# Allegro board VALVECONTROLLER.brd
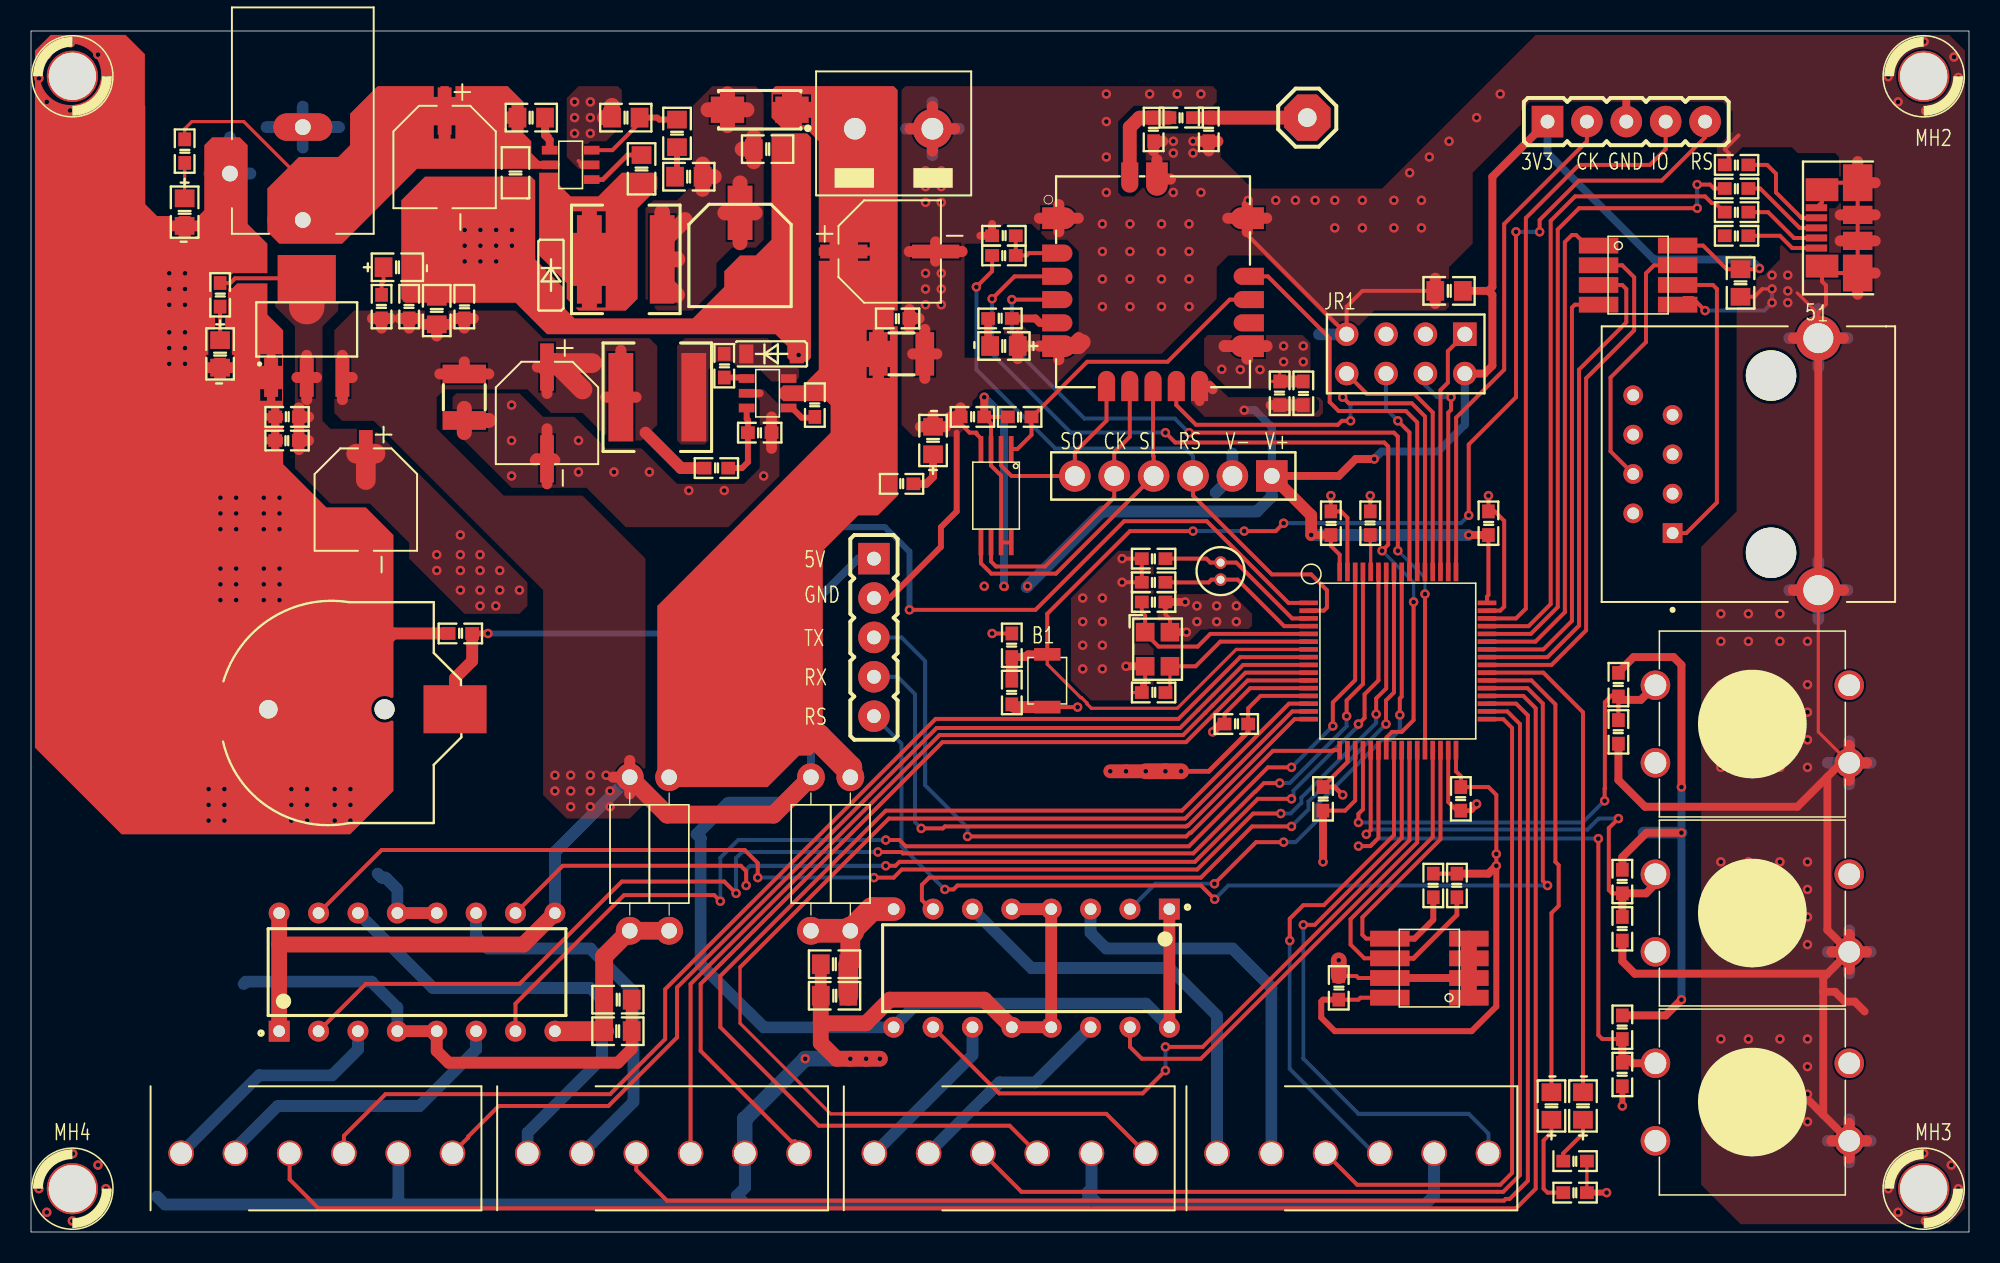
[diagram p0: board, top side]
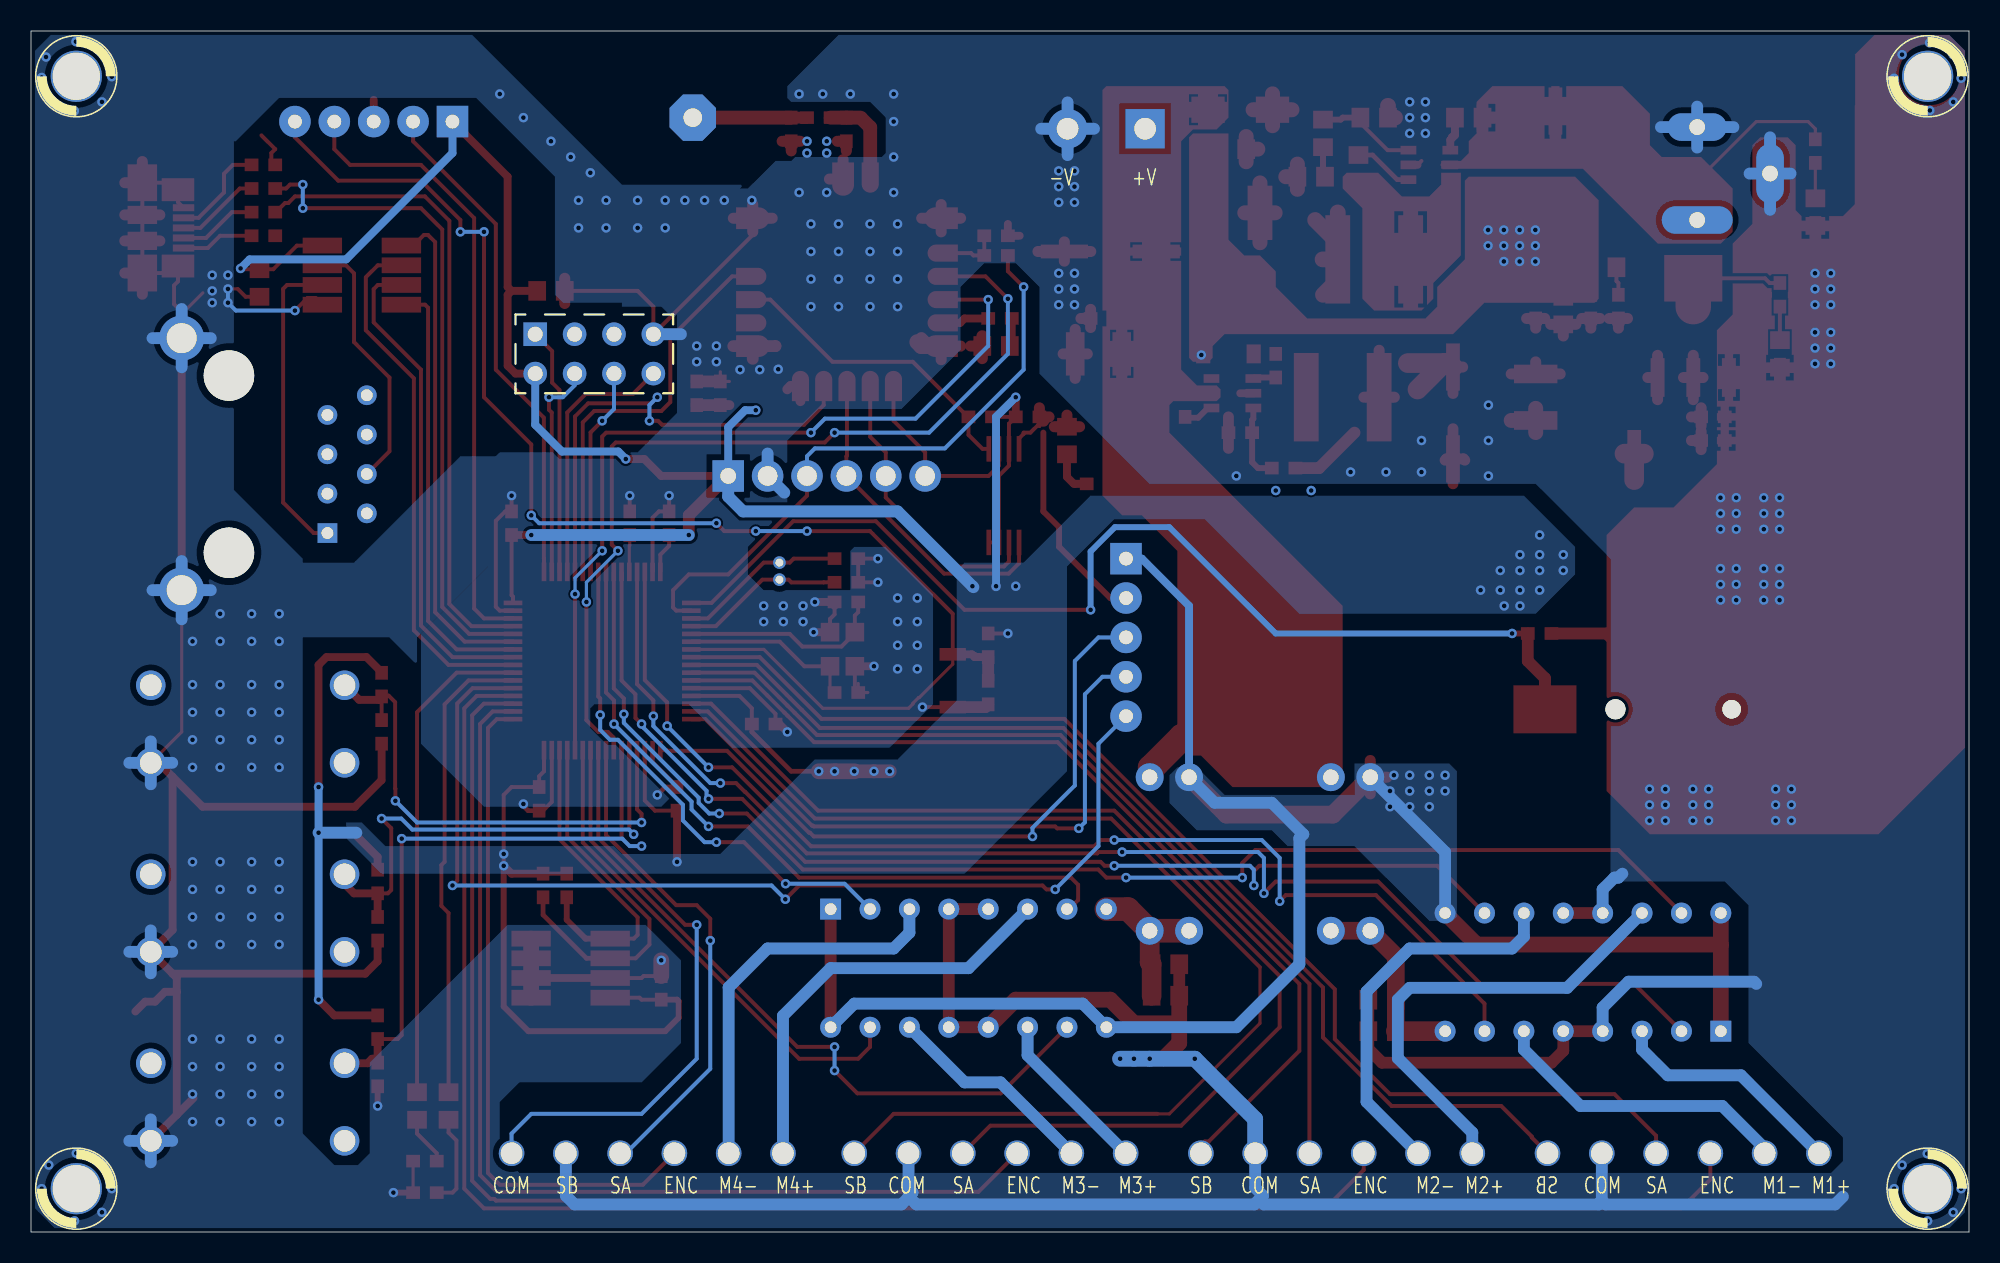
[diagram p1: board, bottom side, seen from below]

Outline 124.97 x 77.47 mm; copper layers: TOP, BOTTOM. Coordinates in mm from the lower left corner of the outline.
Outline path: 0,77.47 0,0 124.97,0 124.97,77.47 0,77.47

## Design rules (mm)
constraint set DEFAULT: min track width 0.203

## Placement (name value [footprint] x y rotation side)
B1  Reset  [B3U-1000P]  65.53 35.56 270 top
C1  10nF/25V  [C0805]  39.37 68.58 270 top
C2  100uF/35V  [CAP_AL_D]  26.67 69.34 270 top
C3  100nF/25V  [C0805]  31.24 68.33 270 top
C4  100nF/25V  [C0805]  47.5 69.85 0 top
C5  100uF/25V  [CAPSMD_D6P3MM]  45.72 62.99 0 top
C6  10nF  [C0603]  44.7 55.88 90 top
C7  100uF/35V  [CAP_AL_D]  55.37 63.25 0 top
C8  100nF  [C0603]  55.88 58.93 0 top
C9  10u/35V  [CAP_1210]  56.13 56.64 0 top
C10  22u/6.3V  [CAP_1210]  27.94 53.85 270 top
C11  220u/16V  [CAP_AL_D]  33.27 52.83 270 top
C12  100nF  [C0603]  27.94 59.69 90 top
C13  10uF  [C0805]  26.16 59.44 90 top
C14  100nF  [C0603]  24.38 59.69 270 top
C15  1uF  [C0603]  16.51 52.58 180 top
C16  100nF  [C0603]  16.51 51.05 0 top
C17  220uF/10v  [CAP_AL_D]  21.59 47.24 270 top
C18  18pF  [C0603]  72.39 43.43 0 top
C19  18pF  [C0603]  72.39 41.91 0 top
C20  18pF  [C0603]  72.39 40.64 0 top
C21  18pF  [C0603]  72.39 34.8 180 top
C22  0.1uF/6.3V  [C0603]  27.69 38.61 180 top
C23  0.1uF/6.3V  [C0603]  83.82 45.72 90 top
C24  0.1uF/6.3V  [C0603]  83.31 27.94 90 top
C25  0.1uF/6.3V  [C0603]  92.2 27.94 270 top
C26  0.1uF/6.3V  [C0603]  93.98 45.72 90 top
C27  0.1uF  [C0603]  77.72 32.77 180 top
C28  0.1uF  [C0603]  84.33 15.75 90 top
C29  0.1uF/6.3V  [C0603]  102.36 32.26 270 top
C30  0.1uF/6.3V  [C0603]  102.62 19.56 270 top
C31  0.1uF/6.3V  [C0603]  102.62 10.16 270 top
C32  0.1uF/6.3V  [C0603]  63.25 34.8 270 top
C33  100uF  [C0805]  51.82 17.27 180 top
C34  100nF  [C0805]  51.82 15.24 0 top
C35  100nF  [C0805]  37.85 12.95 180 top
C36  10uF  [C0805]  37.85 14.99 0 top
C37  10uF  [C0603]  82.04 54.1 90 top
C38  0.1uF  [C0603]  80.52 54.1 270 top
C39  0.1uF  [C0603]  62.74 64.26 180 top
C40  10pF  [C0603]  72.39 71.12 270 top
C41  6pF  [C0603]  75.95 71.12 270 top
C42  0.1uF  [C0603]  60.71 52.58 180 top
C43  0.1uF  [C0805]  91.44 60.71 0 top
C44  0.1uF  [C0805]  110.24 61.21 90 top
D1  1N4007  [DO214AC_SMA]  46.99 72.39 180 top
D2  1N5819  [SOD123]  33.53 61.72 270 top
D3  1N5819  [SOD123]  47.75 56.64 0 top
D4  LED  [LED0805]  12.19 56.64 270 top
D5  LED  [LED0805]  23.62 62.23 0 top
D6  LED  [LED0805]  58.17 51.05 90 top
D7  LED  [LED0805]  9.91 65.79 270 top
D8  LED  [LED0805]  98.04 8.13 90 top
D9  LED  [LED0805]  100.08 8.13 90 top
D10  LED  [LED0805]  62.74 57.15 180 top
E1  ANTENNA  [HEADER_1_3MM]  82.3 71.88 0 top
J1  16VDC  [CONN_JACK_DC]  17.53 65.28 90 top
J2  HEADER 2  [DOMINO2_5]  55.63 71.17 0 top
J3  JTAG/STSW  [HEADER_5]  97.79 71.63 0 top
J4  HUM011D-5-S  [CON5_MICROUSB_SKT_SM]  116.46 64.77 180 top
J5  HEADER 6  [DOMINO6-3_5]  66.29 5.08 180 top
J6  HEADER 6  [DOMINO6-3_5]  88.39 5.08 180 top
J7  HEADER 6  [DOMINO6-3_5]  21.59 5.08 180 top
J8  HEADER 6  [DOMINO6-3_5]  43.94 5.08 180 top
J9  ZW_JTAG  [HEADER-6]  73.66 48.77 270 top
J10  RJ45-8N4-B  [TE_RJ45-8N4-B]  107.85 49.08 90 top
J11  GSM  [HEADER_5]  54.36 43.43 270 top
JR1  ESP8266  [HEADER_4X2]  92.46 57.91 270 top
L1  8.8uH/1.7A  [IND_6X6MM]  38.35 62.74 0 top
L2  8.8uH/1.7A  [IND_6X6MM]  40.39 53.85 180 top
L3  8.2nH  [C0603]  74.17 71.88 0 top
MH1  HOLE 4mm  [MH_3MM_1]  2.67 74.55 0 top
MH*  -  [unnamed]  2.67 2.79 0 top
MH*#2  -  [unnamed]  122.05 2.79 0 top
MH*#3  -  [unnamed]  122.05 74.55 0 top
R1  10k  [R0805]  32.26 71.88 180 top
R2  330k  [R0805]  41.66 70.87 90 top
R3  10k  [R0805]  42.42 68.07 180 top
R4  20k  [R0805]  38.35 71.88 0 top
R5  10K  [R0603]  50.55 53.34 270 top
R6  49.9K  [R0603]  44.2 49.28 180 top
R7  10K  [R0603]  46.99 51.56 0 top
R8  470  [R0603]  12.19 60.45 90 top
R9  1K  [R0603]  22.61 59.69 270 top
R10  4k7  [R0603]  56.13 48.26 180 top
R11  10K  [R0603]  9.91 69.72 90 top
R12  4.7K  [R0603]  86.36 45.72 270 top
R13  0R/NC  [R0603]  109.98 64.26 0 top
R14  22R  [R0603]  109.98 65.79 0 top
R15  22R  [R0603]  109.98 67.31 0 top
R16  0R/NC  [R0603]  109.98 68.83 0 top
R17  10K  [R0603]  90.42 22.35 270 top
R18  10K  [R0603]  91.95 22.35 270 top
R19  4.7K  [R0603]  63.25 37.85 270 top
R20  10K  [R0603]  102.36 35.31 270 top
R21  10K  [R0603]  102.62 22.61 270 top
R22  10K  [R0603]  102.62 13.21 270 top
R23  360  [R0603]  99.57 2.54 0 top
R24  360  [R0603]  99.57 4.57 0 top
R25  0R/NC  [RES_DIP]  52.83 24.51 90 top
R26  0R/NC  [RES_DIP]  50.29 24.26 270 top
R27  0R/NC  [RES_DIP]  41.15 24.51 90 top
R28  0R/NC  [RES_DIP]  38.61 24.26 270 top
R29  22  [R0603]  62.74 62.99 0 top
R30  360  [R0603]  62.48 58.93 180 top
R31  10K  [R0603]  63.75 52.58 0 top
SW1  DETECT SW  [TACT_SWITCH_12X12X7MM_DIP]  111 32.77 270 top
SW2  DETECT SW  [TACT_SWITCH_12X12X7MM_DIP]  111 20.57 270 top
SW3  DETECT SW  [TACT_SWITCH_12X12X7MM_DIP]  111 8.38 270 top
U1  AP3211  [SOT23-6]  34.8 68.83 180 top
U2  AP3211  [SOT23-6]  47.5 54.1 0 top
U3  LM1117 3.3V  [SOT-223]  17.78 58.22 270 top
U4  LQFP64  [LQFP-64]  88.14 36.83 0 top
U5  3V  [BAT_CR1220]  18.99 33.72 270 top
U6  AT2401A/SO  [SOIC-8]  90.17 17.02 180 top
U7  L293D  [DIP16]  64.52 17.02 270 top
U8  L293D  [DIP16]  24.89 16.76 90 top
U9  ZM5202  [ZM5202_A]  79.5 53.59 90 top
U10  CAT25256  [TSSOP-8]  62.23 47.5 270 top
U11  MAX485  [SOIC-8]  103.63 61.72 0 top
Y1  CRYSTAL  [XTAL_2P_TH_1P1MMP]  76.71 43.18 270 top
Y2  12M-18ppm  [CRY3225_M]  72.64 37.59 90 top

## Library data of the parts
B1 = SW PUSHBUTTON-SPST-2_0
C1 C6 C14 C16 C38 C39 C42-C44 = CAP NP
C2 C5 C7 C11 C17 C33 C36 C37 = CAP
C3 C4 = CAP_USER
C8 C12 C13 C15 C34 C35 = Cap 0603
C9 C10 = CAP NP: User Part Number: PartNr
C18-C32 = CAP NP_0
C40 = C-10pF/50V-SMD0805
C41 = C-6pF/50V-SMD0805
D1 = DIODE
D2 = SS34_0
D3 = SS34_2
D4-D7 = LED_0
D8-D10 = LED
E1 = ANTENNA_0
J1 = CONN JACK PWR: User Part Number: X; Tolerance: X
J2 = HEADER 2
J3 J11 = HEADER 5
J4 = USB MIN_6
J5-J9 = HEADER 6
J10 = RJ45-8N4-B
JR1 = CONN FB 8-R
L1 L2 = INDUCTOR
L3 = L-8.2nH-SMD0805
MH1 = MOUNTING HOLE
R1 R13-R16 R25-R28 = RESISTOR
R2-R4 R12 R19 = RESISTOR_0
R5-R7 R23 R24 R29-R31 = RES-SM0402_0
R8-R11 R17 R18 R20-R22 = Resistor 0603
SW1-SW3 = SW PUSHBUTTON-SPST-2
U1 U2 = PMIC_SOT23-6
U3 = RT9193-33GB_1
U4 = STM32-64P_0
U5 = CR2302_1
U6 = AT2401A/SO_1
U7 = L293D_2
U8 = L293D_1
U9 = ZM5202
U10 = CAT25C02_0
U11 = MAX485_1
Y1 = CRYSTAL
Y2 = CRYSTAL-4_0

## Footprints (pads in the part's own frame, mm; a bottom-side part is the same pattern mirrored in y, then rotated)
B3U-1000P
  rect 0.813x1.702 smd: 1(-1.702,0) 2(1.702,0)
BAT_CR1220
  round 1.295 hole 1.295 unplated: (0,3.81)
  round 1.194 hole 1.194 unplated: (0,-3.683)
  rect 3.099x4.064 smd: 1(0,8.357) 2(0,-8.128)
C0603
  rect 0.889x0.813 smd: 1(-0.762,0) 2(0.762,0)
C0805
  rect 1.143x1.27 smd: 1(-0.889,0) 2(0.889,0)
CAP_1210
  rect 1.2x2.8 smd: 1(-1.5,0) 2(1.5,0)
CAP_AL_D
  rect 3.048x0.889 smd: 1(-2.962,0) 2(2.962,0)
CAPSMD_D6P3MM
  rect 1.6x3.5 smd: 1(0,2.75) 2(0,-2.75)
CON5_MICROUSB_SKT_SM
  rect 1.38x0.45 smd: 1(1.33,1.3) 2(1.33,0.65) 3(1.33,0) 4(1.33,-0.65) 5(1.33,-1.3)
  rect 1.9x1.175 smd: 6(-1.33,0.837) 11(-1.33,-0.837)
  rect 1.9x2.375 smd: 7(-1.33,2.913) 10(-1.33,-2.913)
  rect 2.1x1.475 smd: 8(0.97,2.463) 9(0.97,-2.463)
CONN_JACK_DC
  oval 1.778x4.572 hole 1.016: 1(0,0)
  oval 1.778x3.81 hole 1.016: 2(5.994,0)
  oval 3.81x1.778 hole 1.016: 3(2.997,4.699)
CRY3225_M
  rect 1.2x1.2 smd: 1(1.1,0.8) 2(-1.101,0.8) 3(-1.101,-0.8) 4(1.1,-0.8)
DIP16
  rect 1.35x1.35 hole 0.75: 1(-3.81,8.89)
  round 1.35 hole 0.75: 2(-3.81,6.35) 3(-3.81,3.81) 4(-3.81,1.27) 5(-3.81,-1.27) 6(-3.81,-3.81) 7(-3.81,-6.35) 8(-3.81,-8.89) 9(3.81,-8.89) 10(3.81,-6.35) 11(3.81,-3.81) 12(3.81,-1.27) 13(3.81,1.27) 14(3.81,3.81) 15(3.81,6.35) 16(3.81,8.89)
DO214AC_SMA
  rect 2.15x1.696 smd: 1(-2.08,0) 2(2.08,0)
DOMINO2_5
  rect 2.54x2.54 hole 1.397: 1(-2.5,0)
  round 2.54 hole 1.397: 2(2.5,0)
DOMINO6-3_5
  round 1.651 hole 1.397: 1(-5.588,0) 2(-2.088,0) 3(1.412,0) 4(4.912,0) 5(8.412,0) 6(11.912,0)
HEADER-6
  rect 2.032x2.032 hole 1.016: 1(0,6.35)
  round 2.032 hole 1.27: 2(0,3.81) 3(0,1.27) 4(0,-1.27) 5(0,-3.81) 6(0,-6.35)
HEADER_1_3MM
  rrect 3x3 hole 1.2: 1(0,0)
HEADER_4X2
  rect 1.524x1.524 hole 0.965: 1(0,0)
  round 1.524 hole 0.965: 2(0,-2.54) 3(0,-5.08) 4(0,-7.62) 5(2.54,-7.62) 6(2.54,-5.08) 7(2.54,-2.54) 8(2.54,0)
HEADER_5
  rect 2.032x2.032 hole 0.889: 1(0,0)
  round 2.032 hole 0.889: 2(2.54,0) 3(5.08,0) 4(7.62,0) 5(10.16,0)
IND_6X6MM
  rect 1.6x5.7 smd: 1(-2.35,0) 2(2.35,0)
LED0805
  rect 1.143x1.27 smd: 1(-0.889,0) 2(0.889,0)
LQFP-64
  rect 1.2x0.3 smd: 1(-5.75,3.75) 2(-5.75,3.25) 3(-5.75,2.75) 4(-5.75,2.25) 5(-5.75,1.75) 6(-5.75,1.25) 7(-5.75,0.75) 8(-5.75,0.25) 9(-5.75,-0.25) 10(-5.75,-0.75) 11(-5.75,-1.25) 12(-5.75,-1.75) 13(-5.75,-2.25) 14(-5.75,-2.75) 15(-5.75,-3.25) 16(-5.75,-3.75) 33(5.75,-3.75) 34(5.75,-3.25) 35(5.75,-2.75) 36(5.75,-2.25) 37(5.75,-1.75) 38(5.75,-1.25) 39(5.75,-0.75) 40(5.75,-0.25) 41(5.75,0.25) 42(5.75,0.75) 43(5.75,1.25) 44(5.75,1.75) 45(5.75,2.25) 46(5.75,2.75) 47(5.75,3.25) 48(5.75,3.75)
  rect 0.3x1.2 smd: 17(-3.75,-5.75) 18(-3.25,-5.75) 19(-2.75,-5.75) 20(-2.25,-5.75) 21(-1.75,-5.75) 22(-1.25,-5.75) 23(-0.75,-5.75) 24(-0.25,-5.75) 25(0.25,-5.75) 26(0.75,-5.75) 27(1.25,-5.75) 28(1.75,-5.75) 29(2.25,-5.75) 30(2.75,-5.75) 31(3.25,-5.75) 32(3.75,-5.75) 49(3.75,5.75) 50(3.25,5.75) 51(2.75,5.75) 52(2.25,5.75) 53(1.75,5.75) 54(1.25,5.75) 55(0.75,5.75) 56(0.25,5.75) 57(-0.25,5.75) 58(-0.75,5.75) 59(-1.25,5.75) 60(-1.75,5.75) 61(-2.25,5.75) 62(-2.75,5.75) 63(-3.25,5.75) 64(-3.75,5.75)
MH_3MM_1
  round 3.302 hole 3.048: 1(0,0)
R0603
  rect 0.889x0.813 smd: 1(-0.762,0) 2(0.762,0)
R0805
  rect 1.143x1.27 smd: 1(-0.889,0) 2(0.889,0)
RES_DIP
  round 1.8 hole 1: 1(-5.08,0) 2(4.826,0)
SOD123
  rect 0.914x1.219 smd: 1(1.626,0) 2(-1.626,0)
SOIC-8
  rect 2.54x1.016 smd: 1(-2.55,1.905) 2(-2.55,0.635) 3(-2.55,-0.635) 4(-2.55,-1.905) 5(2.55,-1.905) 6(2.55,-0.635) 7(2.55,0.635) 8(2.55,1.905)
SOT23-6
  rect 1.016x0.559 smd: 1(-1.35,0.95) 2(-1.35,0) 3(-1.35,-0.95) 4(1.35,-0.95) 5(1.35,0) 6(1.35,0.95)
SOT-223
  rect 2.5x0.9 smd: 1(3.1,-2.3) 2(3.1,0) 3(3.1,2.3)
  rect 3x3.75 smd: 4(-3.3,0)
TACT_SWITCH_12X12X7MM_DIP
  round 1.905 hole 1.397: 1(-2.502,-6.248) 2(-2.502,6.248) 3(2.502,-6.248) 4(2.502,6.248)
TE_RJ45-8N4-B
  round 3.251 hole 3.251 unplated: (-5.27,-4.35) (6.16,-4.35)
  rect 1.27x1.27 hole 0.762: 1(-4,2)
  round 1.27 hole 0.762: 2(-2.73,4.54) 3(-1.46,2) 4(-0.19,4.54) 5(1.08,2) 6(2.35,4.54) 7(3.62,2) 8(4.89,4.54)
  round 2.896 hole 1.93: S1(-7.683,-7.398) S2(8.573,-7.398)
TSSOP-8
  rect 1.651x0.305 smd: 1(-3.017,0.975) 2(-3.017,0.325) 3(-3.017,-0.325) 4(-3.017,-0.975) 5(3.017,-0.975) 6(3.017,-0.325) 7(3.017,0.325) 8(3.017,0.975)
unnamed
  round 3.302 hole 3.048: 1(0,0)
XTAL_2P_TH_1P1MMP
  round 0.813 hole 0.508: 1(0,0) 2(1.1,0)
ZM5202_A
  custom 1.402x2.15 smd: 1(11.8,13.225) 6(3.55,13.225) 12(3.55,1.075) 16(11.8,1.075)
  custom 1.102x1.952 smd: 2(9.55,13.325) 3(8.05,13.325) 4(6.55,13.325) 5(5.05,13.325) 13(5.05,0.975) 14(6.55,0.975) 15(8.05,0.975)
  custom 1.952x1.102 smd: 7(0.975,10.15) 8(0.975,8.65) 9(0.975,7.15) 10(0.975,5.65) 11(0.975,4.15) 18(14.425,8.65)
  custom 2.15x1.402 smd: 17(14.325,6.9)

## Nets
13.8V: C4.1 C5.1 D1.2 L1.2 R3.1
16V: C2.1 C3.1 J1.1 R1.2 R11.2 U1.5
GND: B1.2 C2.2 C3.2 C4.2 C5.2 C7.2 C8.2 C9.2 C10.2 C11.2 C12.2 C13.2 C14.1 C15.2 C16.1 C17.2 C18.1 C19.1 C20.2 C21.2 C22.2 C23.2 C24.2 C25.2 C26.2 C27.2 C28.2 C29.2 C30.2 C31.2 C32.2 C33.2 C34.1 C35.1 C36.2 C37.2 C38.1 C39.2 C40.2 C41.2 C42.2 C43.1 C44.1 D2.1 D3.1 D4.2(CATHODE) D5.2(CATHODE) D6.2(CATHODE) D7.2(CATHODE) D10.1(CATHODE) J1.2 J1.3 J2.2 J3.3 J4.5 J4.6 J4.7 J4.8 J4.9 J4.10 J4.11 J5.2 J6.2 J7.2 J8.2 J9.2 J10.S1 J10.S2(SHIELD__1) J11.2 JR1.4 R4.1 R7.2 R12.1 R16.1 R23.2 R24.2 SW1.4 SW2.4 SW3.4 U1.2 U2.2 U3.1 U4.12(VSSA) U4.18 U4.31 U4.47 U4.63 U5.2(-) U6.1 U6.2 U6.3 U6.4 U6.7(WP) U7.4 U7.5 U7.12 U7.13 U8.4 U8.5 U8.12 U8.13 U9.1 U9.6 U9.12 U9.16 U9.17 U10.4 U11.5 Y2.2 Y2.4
VCC3.3V: C15.1 C16.2 C17.1 C23.1 C24.1 C25.1 C26.1 C27.1 C28.1 C37.1 C38.2 C42.1 C43.2 C44.2 J3.1 J9.1 JR1.8 R8.2 R17.1 R18.1 R19.1 R20.1 R21.1 R22.1 R31.1 U3.2 U3.4 U4.13 U4.19 U4.32 U4.48 U4.64 U6.8 U9.11 U10.3(W\P\) U10.7 U10.8 U11.8(VCC)
VCC_5V: C10.1 C11.1 C12.1 C13.1 C14.2 J11.1 L2.2 R6.2 R9.2 R26.1 R28.1 U3.3(VIN) U7.1 U7.9 U7.16(VSS) U8.1 U8.9 U8.16(VSS)
VIN: C7.1 C8.1 C9.1 D1.1(K) J2.1 R5.1 R10.2 R25.2 R27.2 U2.5
ANTEN: C41.1 E1.1 L3.2
BT_1: C29.1 R20.2 SW1.1 U4.20
BT_2: C30.1 R21.2 SW2.1 U4.21
BT_3: C31.1 R22.2 SW3.1 U4.22
DBG_LED_1: D8.2 U4.38
DBG_LED_2: D9.2 U4.39
ESP_CHPD: JR1.6 U4.55
ESP_GPIO1: JR1.2
ESP_GPIO2: JR1.3
ESP_RST: JR1.7 U4.50
ESP_RX: JR1.1 U4.51
ESP_TX: JR1.5 U4.52
GSM_RST: J11.5 U4.37
GSM_RX: J11.4 U4.16
GSM_TX: J11.3 U4.17
JTCK-SWCLK: J3.2 U4.49
JTMS-SWDIO: J3.4 U4.46
LED: R30.1 U9.5
MCU_DM: R15.1 U4.44
MCU_DP: R14.1 U4.45
MCU_SCL: R18.2 U4.29 U6.6
MCU_SDA: R17.2 U4.30 U6.5
MOTOR1_A: J5.6 U7.11
MOTOR1_B: J5.5 U7.14
MOTOR1_ENC: J5.4 U4.34
MOTOR1_SA: J5.3 U4.14
MOTOR1_SB: J5.1 U4.15
MOTOR2_A: J6.6 U7.6
MOTOR2_B: J6.5 U7.3
MOTOR2_ENC: J6.4 U4.33
MOTOR2_SA: J6.3 U4.24
MOTOR2_SB: J6.1 U4.25
MOTOR3_A: J7.6 U8.3
MOTOR3_B: J7.5 U8.6
MOTOR3_ENC: J7.4 U4.36
MOTOR3_SA: J7.3 U4.8
MOTOR3_SB: J7.1 U4.9
MOTOR4_A: J8.6 U8.14
MOTOR4_B: J8.5 U8.11
MOTOR4_ENC: J8.4 U4.35
MOTOR4_SA: J8.3 U4.10
MOTOR4_SB: J8.1 U4.11
NRST: B1.1 C32.1 J3.5 R19.2 U4.7
PC14: C18.2 U4.3 Y1.1
PC15: C19.2 U4.4 Y1.2
PWM1_A: U4.26 U7.10
PWM1_B: U4.27 U7.15
PWM2_A: U4.56 U7.2
PWM2_B: U4.57 U7.7
PWM3_A: U4.58 U8.15
PWM3_B: U4.59 U8.10
PWM4_A: U4.61 U8.2
PWM4_B: U4.62 U8.7
RF: C40.1 L3.1 U9.18
RS485_A: J10.1 U11.6
RS485_B: J10.4 U11.7
RS485_DE: U4.41 U11.3
RS485_DI: U4.42 U11.4
RS485_RE: U4.40 U11.2
RS485_RO: U4.43 U11.1
USB_DM: J4.2 R14.2
USB_DP: J4.3 R15.2
VS_L298A: C33.1 C34.2 R25.1 R26.2 U7.8
VS_L298B: C35.2 C36.1 R27.1 R28.2 U8.8
ZM_INT0: U4.23 U9.3
ZM_INT1: U4.28 U9.4
ZM_RESET: J9.3 R29.1 U4.2
ZM_RX: U4.53 U9.10
ZM_TX: U4.54 U9.15
ZWAVE_SPI_CS: R31.2 U9.14(ZEROX) U10.1
ZWAVE_SPI_MISO: J9.6 U9.7 U10.2
ZWAVE_SPI_MOSI: J9.4 U9.9 U10.5
ZWAVE_SPI_SCLK: J9.5 U9.8 U10.6
N7856489: R12.2 U4.60
N7856549: C21.1 U4.6 Y2.3(XOUT)
N7856557: C20.1 U4.5 Y2.1
N7858677: D4.1 R8.1
N7861566: C39.1 R29.2 U9.2
N7870414: J4.1 R13.2
N7870518: J4.4(ID) R16.2
N7874965: C22.1 U4.1 U5.1
N7889145: D8.1(CATHODE) R23.1
N7938829: R13.1
N7950983: R1.1 U1.4
N7951075: C1.2 D2.2(CATHODE) L1.1 U1.6(SW)
N7951087: R2.2 R4.2 U1.3
N7953648: C1.1 U1.1
N7971855: R5.2 U2.4
N7971871: C6.1 U2.1
N7971879: C6.2 D3.2(CATHODE) L2.1 U2.6(SW)
N7971887: R6.1 R7.1 U2.3
N7975298: D9.1(CATHODE) R24.1
N7976019: D5.1 R9.1
N7976225: D6.1 R10.1
N7976823: D7.1 R11.1
N79509350: R2.1 R3.2
N79587921: D10.2 R30.2

Pads without a net: J10 2 3 5 6 7 8; MH1 1; MH* 1; MH*#2 1; MH*#3 1; SW1 2 3; SW2 2 3; SW3 2 3; U9 13

## Via types
v1: diameter 0.61, hole 0.305, TOP to BOTTOM, 379 vias

## Routing (per net, layer and track width the routed paths; a pad name or vN(x,y) marks a point on that pad's centre or on a via; arc(x,y) is an arc through that point)
13.8V: length 23.9
  TOP w0.965: D1.2 46.16,72.39 ; D1.2 44.91,71.36 ; D1.2 44.91,73.42 ; D1.2 43.66,72.39 ; 46.61,69.04 C4.1 ; C4.1 46.61,70.66 ; C4.1 45.86,69.85 ; 44.74,65.74 C5.1 ; C5.1 45.72,63.81 ; C5.1 46.7,65.74 ; C5.1 45.72,67.67 ; R3.1 43.31,68.88 ; R3.1 44.06,68.07 ; R3.1 43.31,67.26
  TOP w1.016: L1.2 40.7,61.4 41.66,60.45 ; L1.2 41.68,62.74 ; L1.2 40.7,63.82 ; 40.7,63.82 40.7,65.77 ; 40.7,63.82 42.16,65.28
16V: length 17.2
  TOP w0.203: R11.2 9.91,71.16 10.38,71.63 13.72,71.63 16.76,68.58
  TOP w0.254: 33.96,68.83 U1.5
  TOP w0.762: C3.1 31.24,69.96 ; C3.1 32.05,69.21 ; C3.1 30.43,69.21 ; R1.2 31.37,71.07 ; R1.2 30.62,71.88 ; R1.2 31.37,72.69 ; C2.1 26.67,70.6 ; C2.1 27.29,72.3 ; C2.1 26.05,72.3
GND: length 573.5
  TOP w0.203: 78.43,56.27 78.43,56.33 ; R24.2 R23.2 ; 71.63,35.38 C21.2 71.01,34.8 ; 37.47,72.69 37.47,72.64 ; 80.52,55.49 C38.1 79.93,54.86 ; 36.72,71.88 37.01,71.88 ; 113.89,60.58 115,59.47 115,57.91 ; J10.S1 115.25,32.26 SW1.4 ; v1(112.27,60.83) 111.63,60.83
  TOP w0.254: R12.1 v1(86.36,47.5) ; U4.47 94.74,40.08 95,40.33 95,45.87 94.39,46.48 C26.2 v1(93.98,47.5) ; U6.7 85.6,16.38 85.47,16.51 C28.2 ; 35.31,69.09 35.56,68.83 ; Y2.4 73.44,39.55 73.15,39.84 73.15,40.39 ; v1(70.36,41.91) C19.1 C18.1 v1(70.36,43.43) ; C21.2 71.84,35.01 Y2.2 ; U9.17 72.6,67.54 ; U11.5 106.61,60.25 107.14,60.25 v1(107.95,59.44) ; U9.12 78.43,57.14 ; U4.31 91.39,27.74 91.95,27.18 C25.2 ; U4.12 78.62,35.08 76.96,33.43 C27.2 ; U4.63 84.89,46.07 84.48,46.48 C23.2 v1(83.82,47.5) ; U9.16 78.43,65.39 78.43,64.44 78.43,64.44 78.43,64.32 JR1.4 84.84,59.69 85.85,60.71 C43.1 ; J4.5 115.49,66.43 J4.9 115.94,67.68 J4.10 J4.11 J4.6 J4.7 115.94,61.86 J4.8 115.49,61.32 115.74,61.06 115.74,59.85 115.25,59.36 J10.S2 ; C42.2 59.94,51.99 60.02,52.07 60.52,51.56 60.96,51.56 60.96,51.48 61.25,51.19 U10.4 ; C24.2 83.31,28.74 84.89,30.32 84.89,30.33 U4.18 ; 110.11,70.74 109.22,69.85 109.47,69.6 109.47,69.09 R16.1 ; B1.2 v1(67.49,33.86) ; C44.1 111.12,60.32 111.63,60.83
  TOP w0.305: v1(84.58,28.19) 84.07,28.7 C24.2 ; C25.2 92.91,27.18 93.22,27.48 v1(93.22,27.61)
  TOP w0.381: J11.2 55.37,40.89 58.67,44.2 58.67,45.47 59.69,46.48 59.69,51.56 ; C31.2 v1(102.62,8.13) ; R23.2 v1(101.6,2.54)
  TOP w0.508: 115.57,15.49 116.33,15.49 116.97,14.86 117.6,14.86 118.24,14.22 ; 115.57,15.49 115.57,7.56 ; 115.57,15.49 115.57,16.4 115.84,16.66 ; 115,57.91 J10.S2 J10.S1 ; 115.84,16.66 103.42,16.66 102.62,17.46 C30.2 ; 115.84,16.66 SW2.4 115.84,19.48 115.84,29.36 ; C27.2 76.71,32.77 v1(76.2,32.26) ; 115.84,29.36 116.74,30.26 SW1.4 ; 115.84,29.36 113.91,27.43 104.08,27.43 102.36,29.15 C29.2 ; 35.56,68.83 U1.2 ; Y2.4 v1(74.51,38.69) ; v1(74.42,40.64) C20.2 73.15,40.39 ; 63.37,56.77 63.37,56.9 D10.1 ; 61.21,64.26 C39.2 61.98,65.02 ; SW3.4 115.57,7.56 ; 115.57,7.56 114.49,8.64 ; D7.2 9.09,64.9 ; D7.2 9.91,64.15 ; D7.2 10.92,64.9 ; U6.7 U6.2 ; 102.87,73.02 J3.3 ; U2.2 46.99,54.1 ; Y2.2 v1(70.61,36.49)
  TOP w0.7: 33.78,49.78 33.7,49.87 C11.2 ; 47.75,50.55 R7.2 47.75,52.58 ; 32.51,49.78 32.6,49.87 C11.2 ; C11.2 33.27,51.82 ; C11.2 33.27,48.26
  TOP w0.711: 118.92,63.93 J4.6 116.66,63.93 ; J2.2 58.13,72.61 ; J2.2 58.13,69.72 ; J2.2 59.57,71.17 ; J2.2 56.68,71.17 ; 58.33,62.62 C7.2 ; C7.2 56.63,63.25 ; C7.2 58.33,63.87 ; C7.2 60.04,63.25 ; C9.2 57.63,58.22 ; C9.2 58.41,56.64 ; C9.2 56.86,56.64 ; C9.2 57.63,55.06 ; 116.88,57.66 J10.S2 113.63,57.66 ; 63.63,56.34 D10.1 64.38,57.15 ; SW2.4 118.38,18.07 ; SW2.4 116.12,18.07 ; SW2.4 117.25,19.2 ; SW2.4 117.25,16.94 ; 116.66,65.61 J4.11 118.92,65.61 ; 113.63,41.4 J10.S1 116.88,41.4 ; 78.43,64.52 U9.16 ; U9.16 78.43,66.27 ; U9.16 77.17,65.39 ; U9.16 79.68,65.39 ; 117.25,4.75 SW3.4 ; SW3.4 118.38,5.88 ; SW3.4 116.12,5.88 ; SW3.4 117.25,7.01 ; 72.6,69.17 U9.17 73.48,67.92 ; U9.1 67.53,65.39 ; U9.1 65.02,65.39 ; U9.1 66.28,66.27 ; U9.1 66.28,64.52 ; D6.2 58.17,52.69 ; D6.2 57.35,51.94 ; D6.2 58.98,51.94 ; 59.32,52.58 C42.2 59.94,53.16 ; 72.39,69.74 C40.2 72.97,70.36 ; 90.55,59.89 C43.1 90.55,61.52 ; 117.79,69.05 J4.10 118.92,67.68 ; C8.2 56.64,59.51 ; C8.2 57.26,58.93 ; C8.2 56.64,58.34 ; 118.92,61.86 J4.7 117.79,60.49 ; SW1.4 118.38,30.26 ; SW1.4 117.25,29.13 ; SW1.4 117.25,31.39 ; 66.28,56.27 U9.6 65.02,57.14 ; 75.36,70.36 C41.2 ; C41.2 76.53,70.36 ; C41.2 75.95,69.74
  TOP w0.762: C22.2 23.37,38.61 23.11,38.35 ; U8.4 U8.5 26.16,11.68 26.92,10.92 37.85,10.92 38.74,11.81 C35.1 C36.2 ; C42.2 59.69,52.32 ; U8.13 U8.12 ; U9.12 79.68,57.14 ; U9.12 78.43,56.33 ; U9.12 76.97,57.14 76.96,57.15 ; C32.2 63.42,33.86 B1.2 ; U7.5 U7.4 U7.13 U7.12 ; 67.55,57.67 67.03,57.14 ; 49.28,57.91 49.38,57.81 D3.1 ; C38.1 C37.2 ; 50.93,15.24 50.93,17.27 ; D10.1 63.63,57.78
  TOP w0.965: C10.2 27.94,53.13 ; C10.2 29.52,52.35 ; C10.2 27.94,51.57
  TOP w1.016: 92.72,18.92 U6.3 U6.2 U6.1 ; 50.93,13.46 50.93,12.19 51.94,11.18 v1(52.83,11.18) v1(53.85,11.18) v1(54.74,11.18) ; 50.93,13.46 53.85,13.46 55.37,14.99 61.47,14.99 U7.12 ; 50.93,13.46 50.93,15.24 ; C28.2 v1(84.33,17.53) ; 67.82,57.4 67.56,57.14 U9.6 ; D2.1 33.53,60.73 ; D2.1 33.53,59.44 ; D2.1 32.54,60.1 ; 37.01,71.88 R4.1 37.47,72.64
  BOTTOM w0.254: v1(112.27,60.83) v1(112.27,59.94) 111.76,59.44 v1(107.95,59.44)
  BOTTOM w0.762: SW2.4 117.25,19.46 ; SW2.4 117.25,16.69 ; SW2.4 118.63,18.07 ; SW2.4 115.86,18.07 ; 115.86,5.88 SW3.4 ; SW3.4 117.25,7.26 ; SW3.4 117.25,4.5 ; SW3.4 118.63,5.88 ; 12.83,68.28 12.83,70.61 ; 12.83,68.28 14.15,68.28 ; 12.83,68.28 11.51,68.28 ; 12.83,68.28 12.83,65.94 ; J10.S2 117.13,57.66 ; J10.S2 115.25,59.54 ; J10.S2 113.37,57.66 ; J10.S2 115.25,55.78 ; J2.2 59.83,71.17 ; J2.2 58.13,72.87 ; J2.2 58.13,69.46 ; J2.2 56.42,71.17 ; 45.78,2.09 45.47,1.78 23.88,1.78 23.88,1.83 23.68,2.03 ; 23.68,2.03 J7.2 ; 23.68,2.03 23.42,1.78 8.64,1.78 8.13,2.29 ; 68.38,2.29 68.13,2.54 68.38,2.79 J5.2 ; 68.38,2.29 67.87,1.78 46.09,1.78 45.52,2.34 46.03,2.85 J8.2 ; 68.38,2.29 68.38,2.23 68.83,1.78 89.92,1.78 90.48,2.34 J6.2 ; 115.86,30.26 SW1.4 ; SW1.4 117.25,28.88 ; SW1.4 117.25,31.65 ; SW1.4 118.63,30.26 ; 76.4,47.69 J9.2 77.47,50.22 ; J10.S1 117.13,41.4 ; J10.S1 113.37,41.4 ; J10.S1 115.25,39.52 ; J10.S1 115.25,43.28 ; 22.35,23.11 22.61,22.86 22.86,22.86 23.62,22.1 U8.13 ; J1.2 19.86,71.27 ; J1.2 17.53,69.95 ; J1.2 15.19,71.27 ; J1.2 17.53,72.59 ; 83.06,57.91 JR1.4 ; 13.72,16 13.86,16.14 21.96,16.14 23.62,14.48 U8.4
  BOTTOM w1.016: J8.2 46.03,7.28 v1(49.92,11.18) v1(52.83,11.18) v1(53.85,11.18) v1(54.74,11.18)
  vias: v1(0.51,74.42) v1(0.51,2.79) v1(1.02,75.95) v1(1.02,72.9) v1(1.02,4.32) v1(1.02,1.27) v1(2.54,76.71) v1(2.52,72.34) v1(2.69,5.05) v1(2.67,0.71) v1(4.32,75.95) v1(4.32,72.9) v1(4.32,4.32) v1(4.32,1.27) v1(4.83,74.42) v1(4.83,2.79) v1(8.91,61.84) v1(8.91,60.83) v1(8.91,59.81) v1(8.91,58.03) v1(8.91,57.02) v1(8.91,56) v1(9.93,61.84) v1(9.93,60.83) v1(9.93,59.81) v1(9.93,58.03) v1(9.93,57.02) v1(9.93,56) v1(11.45,28.57) v1(11.45,27.55) v1(11.45,26.54) v1(12.22,47.37) v1(12.22,46.35) v1(12.22,45.33) v1(12.22,42.79) v1(12.22,41.78) v1(12.22,40.76) v1(12.47,28.57) v1(12.47,27.55) v1(12.47,26.54) v1(13.23,47.37) v1(13.23,46.35) v1(13.23,45.33) v1(13.23,42.79) v1(13.23,41.78) v1(13.23,40.76) v1(15.01,47.37) v1(15.01,46.35) v1(15.01,45.33) v1(15.01,42.79) v1(15.01,41.78) v1(15.01,40.76) v1(16.03,47.37) v1(16.03,46.35) v1(16.03,45.33) v1(16.03,42.79) v1(16.03,41.78) v1(16.03,40.76) v1(16.79,28.57) v1(16.79,27.55) v1(16.79,26.54) v1(17.8,28.57) v1(17.8,27.55) v1(17.8,26.54) v1(19.58,28.57) v1(19.58,27.55) v1(19.58,26.54) v1(20.6,28.57) v1(20.6,27.55) v1(20.6,26.54) v1(27.96,64.64) v1(27.96,63.62) v1(27.96,62.61) v1(28.98,64.64) v1(28.98,63.62) v1(28.98,62.61) v1(30,64.64) v1(30,63.62) v1(30,62.61) v1(31.01,64.64) v1(31.01,63.62) v1(30.99,53.34) v1(30.99,51.05) v1(30.99,48.77) v1(35.05,72.9) v1(35.05,71.88) v1(35.05,70.87) v1(35.31,51.05) v1(35.31,49.02) v1(36.07,72.9) v1(36.07,71.88) v1(36.07,70.87) v1(37.59,49.02) v1(39.88,49.02) v1(42.42,47.83) v1(44.7,47.83) v1(47.24,48.77) v1(49.5,56.57) v1(57.68,68.45) v1(57.68,67.43) v1(57.68,66.42) v1(57.68,61.84) v1(57.68,60.83) v1(57.68,59.81) v1(58.7,68.45) v1(58.7,67.43) v1(58.7,66.42) v1(58.7,61.84) v1(58.7,60.83) v1(58.7,59.81) v1(67.82,40.89) v1(67.82,39.37) v1(67.82,37.85) v1(67.82,36.32) v1(69.09,65.02) v1(69.09,63.25) v1(69.09,61.47) v1(69.09,59.69) v1(69.09,40.89) v1(69.09,39.37) v1(69.09,37.85) v1(69.09,36.32) v1(69.34,73.41) v1(69.34,71.63) v1(69.34,69.34) v1(69.34,67.06) v1(70.87,65.02) v1(70.87,63.25) v1(70.87,61.47) v1(70.87,59.69) v1(72.14,73.41) v1(72.9,65.02) v1(72.9,63.25) v1(72.9,61.47) v1(72.9,59.69) v1(73.66,70.36) v1(73.66,69.6) v1(73.66,67.06) v1(73.91,73.41) v1(74.68,65.02) v1(74.68,63.25) v1(74.68,61.47) v1(74.68,59.69) v1(74.93,70.36) v1(74.93,69.6) v1(75.18,40.39) v1(75.18,39.37) v1(75.44,73.41) v1(75.44,67.06) v1(76.45,40.39) v1(76.45,39.37) v1(76.78,55.65) v1(77.72,40.39) v1(77.72,39.37) v1(77.98,55.63) v1(78.49,66.55) v1(79.25,55.63) v1(80.26,66.55) v1(80.77,57.15) v1(80.77,56.13) v1(81.53,66.55) v1(82.04,57.15) v1(82.04,56.13) v1(82.8,66.55) v1(84.07,66.55) v1(84.07,64.77) v1(85.85,66.55) v1(85.85,64.77) v1(87.88,66.55) v1(87.88,64.77) v1(88.9,68.33) v1(89.66,66.55) v1(89.66,64.77) v1(90.17,69.34) v1(91.44,70.36) v1(93.22,71.88) v1(94.74,73.41) v1(108.97,39.88) v1(108.97,38.1) v1(108.97,35.31) v1(108.97,33.53) v1(108.97,31.75) v1(108.97,29.97) v1(108.97,23.88) v1(108.97,22.1) v1(108.97,20.32) v1(108.97,18.54) v1(108.97,12.45) v1(108.97,10.67) v1(108.97,8.89) v1(108.97,7.11) v1(110.74,39.88) v1(110.74,38.1) v1(110.74,35.31) v1(110.74,33.53) v1(110.74,31.75) v1(110.74,29.97) v1(110.74,23.88) v1(110.74,22.1) v1(110.74,20.32) v1(110.74,18.54) v1(110.74,12.45) v1(110.74,10.67) v1(110.74,8.89) v1(110.74,7.11) v1(112.27,61.72) v1(112.78,39.88) v1(112.78,38.1) v1(112.78,35.31) v1(112.78,33.53) v1(112.78,31.75) v1(112.78,29.97) v1(112.78,23.88) v1(112.78,22.1) v1(112.78,20.32) v1(112.78,18.54) v1(112.78,12.45) v1(112.78,10.67) v1(112.78,8.89) v1(112.78,7.11) v1(113.28,61.72) v1(113.28,60.71) v1(113.28,59.94) v1(114.55,38.1) v1(114.55,35.31) v1(114.55,33.53) v1(114.55,31.75) v1(114.55,29.97) v1(114.55,23.88) v1(114.55,22.1) v1(114.55,20.32) v1(114.55,18.54) v1(114.55,12.45) v1(114.55,10.67) v1(114.55,8.89) v1(114.55,7.11) v1(119.76,74.52) v1(119.76,2.79) v1(120.29,75.97) v1(120.4,72.9) v1(120.4,4.32) v1(120.4,1.27) v1(122.07,76.78) v1(122.05,5.08) v1(122.17,72.31) v1(122.16,0.71) v1(123.7,72.9) v1(123.82,4.32) v1(123.82,1.27) v1(124,75.79) v1(124.28,74.47) v1(124.28,2.79)
VCC3.3V: length 264.8
  TOP w0.203: 75.99,54.57 76.08,54.57 ; 75.35,53.42 75.35,53.59
  TOP w0.254: U6.8 85.73,15.11 85.6,14.99 C28.1 ; U4.13 79.28,34.58 78.49,33.78 C27.1 ; U4.64 84.39,43.69 83.82,44.26 C23.1 ; R17.1 R18.1 ; U4.32 91.89,29.71 92.2,29.4 C25.1 93.98,28.7 94.49,28.19 v1(94.49,24.38) v1(94.49,23.62) ; R8.2 12.85,61.21 13.16,61.52 U3.4 ; C24.1 84.73,27.18 85.39,27.83 U4.19 85.39,31.23 ; 106.18,63.63 107.82,63.63 109.35,62.1 C44.2 111.4,62.1 v1(111.46,62.15) ; U10.8 U10.7 62.56,48.79 61.9,49.44 U10.3 61.9,52.14 C42.1 R31.1 ; U4.48 93.89,40.98 93.98,41.08 C26.1 ; R19.1 v1(61.98,38.61)
  TOP w0.305: v1(74.17,29.72) 75.95,29.72 78.49,32.26 C27.1
  TOP w0.381: v1(94.49,23.62) 94.49,14.55 92.9,12.95 84.07,12.95 83.2,13.83 83.2,14.87 83.31,14.99 C28.1
  TOP w0.508: R22.1 105.41,13.97 v1(106.43,14.99) ; 93.98,60.71 94.23,60.45 94.23,55.88 93.73,55.37 JR1.8 ; 93.98,60.71 C43.2 ; 93.98,60.71 94.23,60.96 94.23,68.07 J3.1 ; R21.1 102.62,24.19 104.18,25.76 v1(106.43,25.76) ; C23.1 v1(82.55,44.96) ; v1(83.31,23.88) C24.1 ; v1(62.74,41.66) 62.8,41.59 ; v1(61.47,53.85) C42.1 ; R18.1 93.98,23.11 v1(94.49,23.62) ; v1(92.71,44.96) C26.1 ; v1(86.61,49.86) 85.42,49.86 84.33,48.77 J9.1 ; v1(106.43,28.7) 106.43,36.58 105.92,37.08 103.34,37.08 102.36,36.11 R20.1
  TOP w0.635: C38.2 79.93,53.34 ; 75.35,53.59 U9.11 75.99,54.57 76.2,54.36
  TOP w0.711: 17.78,53.69 U3.2 ; U3.2 18.41,55.12 ; U3.2 17.78,56.55 ; U3.2 17.15,55.12 ; 17.27,51.99 C15.1 ; C15.1 17.89,52.58 ; C15.1 17.27,53.16 ; C16.2 17.27,51.64 ; C16.2 17.89,51.05 ; C16.2 17.27,50.47
  TOP w0.762: J9.1 82.55,46.23 v1(82.55,44.96) ; C37.1 C38.2
  TOP w0.889: v1(71.88,29.72) v1(70.61,29.72) v1(69.6,29.72)
  TOP w1.016: v1(74.17,29.72) v1(73.15,29.72) v1(71.88,29.72)
  TOP w1.27: C17.1 20.97,50.21 ; C17.1 22.21,50.21 ; C17.1 21.59,48.5
  TOP w2.286: U3.4 17.78,59.69
  BOTTOM w0.508: v1(106.43,14.99) v1(106.43,25.76) v1(106.43,28.7) ; J9.1 80.01,51.92 78.92,53.01 v1(78.23,53.01) ; JR1.8 92.46,52.07 90.73,50.35 87.1,50.35 v1(86.61,49.86) ; v1(61.47,53.85) 62.74,52.58 v1(62.74,41.66) 62.74,41.59 ; J3.1 97.79,69.6 104.65,62.74 110.87,62.74 v1(111.46,62.15)
  BOTTOM w0.762: 64.2,41.59 v1(64.26,41.66) 69.09,46.48 79.06,46.48 80.01,47.43 J9.1 ; v1(92.71,44.96) v1(82.55,44.96) ; v1(106.43,25.76) 103.99,25.76
  vias: v1(26.16,43.69) v1(26.16,42.67) v1(27.69,44.96) v1(27.69,43.69) v1(27.69,42.67) v1(27.69,41.4) v1(28.96,43.69) v1(28.96,42.67) v1(28.96,41.4) v1(28.96,40.39) v1(29.97,40.39) v1(30.23,42.67) v1(30.23,41.4) v1(31.5,41.4) v1(61.47,41.66)
VCC_5V: length 161.7
  TOP w0.711: 20.08,53.69 U3.3 ; U3.3 20.71,55.12 ; U3.3 20.08,56.55 ; L2.2 38.04,56.88 ; L2.2 37.06,53.85 ; L2.2 39.01,53.85 ; 26.16,57.8 C13.1 ; C13.1 26.97,58.55 ; C13.1 25.35,58.55 ; R28.1 38.61,30.41 ; R28.1 37.53,29.34 ; R28.1 38.61,28.26 ; C10.1 29.52,55.35 ; C10.1 26.36,55.35 ; C10.1 27.94,56.13 ; 22.02,58.93 R9.2 ; R9.2 23.19,58.93 ; R9.2 22.61,58.31 ; C14.2 24.97,58.93 ; C14.2 23.8,58.93 ; C14.2 24.38,58.31 ; C12.1 28.52,58.93 ; C12.1 27.94,58.31 ; C12.1 27.36,58.93 ; 33.27,54.09 C11.1 ; C11.1 33.9,55.79 ; C11.1 32.65,55.79
  TOP w0.762: 39.62,51.56 41.91,49.28 R6.2 ; U7.1 U7.16
  TOP w1.016: 16,18.54 U8.1 ; 16,18.54 U8.16 ; 16,18.54 31.75,18.54 U8.9
  TOP w1.143: R26.1 47.88,26.92 41.02,26.92 R28.1
  TOP w1.27: C11.1 33.53,56.05 33.86,56.05 ; 33.86,56.05 35.56,54.35 ; 33.86,56.05 36.18,56.05
  BOTTOM w0.508: R26.1 50.29,40.39 53.34,43.43 J11.1
  BOTTOM w0.762: R26.1 48.64,27.69 44.96,27.69 42.93,25.65 43.18,25.4 43.18,17.27 47.24,13.21 U7.9 57.15,14.73 71.88,14.73 U7.16 ; R28.1 33.78,24.51 U8.9
  vias: v1(33.78,29.46) v1(33.78,28.45) v1(34.8,29.46) v1(34.8,28.45) v1(34.8,27.43) v1(36.07,29.46) v1(36.07,28.45) v1(36.07,27.43) v1(37.08,29.46) v1(37.34,28.45) v1(37.34,27.43)
VIN: length 14.6
  TOP w0.635: U2.5 R5.1
  TOP w1.016: 53.09,29.08 49.4,32.77 ; 49.15,33.02 49.02,33.02
  TOP w1.27: 41.15,29.34 43.56,31.75
  TOP w1.524: 50.23,31.94 50.29,32 50.8,32 52.83,29.97 52.83,29.34
ANTEN: length 7.4
  TOP w0.762: C41.1 L3.2
  TOP w0.889: C41.1 E1.1
BT_1: length 33.1
  TOP w0.254: v1(101.47,27.81) 101.47,28.6 101.49,28.61 101.49,34.18 101.91,34.6 102.27,34.6 102.36,34.51 C29.1 ; v1(85.6,26.42) 85.6,26.97 85.89,27.26 U4.20
  TOP w0.508: SW1.1 103.81,34.33 102.54,34.33 102.36,34.51 R20.2
  BOTTOM w0.254: v1(85.6,26.42) 100.08,26.42 v1(101.47,27.81)
BT_2: length 32.6
  TOP w0.254: v1(86.11,25.65) 86.39,25.94 U4.21 ; R21.2 101.96,21.84 101.74,22.06 101.74,26.05 v1(102.36,26.67)
  TOP w0.508: SW2.1 104.75,22.45 104.14,21.84 R21.2 C30.1
  BOTTOM w0.254: v1(86.11,25.65) 86.41,25.96 100.38,25.96 101.09,26.67 v1(102.36,26.67)
BT_3: length 41.1
  TOP w0.254: R22.2 101.32,12.45 101.07,12.7 v1(101.07,25.37) ; U4.22 86.89,25.42 86.36,24.89 v1(85.6,24.89)
  TOP w0.508: SW3.1 103.27,10.88 102.98,11.18 102.87,11.18 C31.1 R22.2
  BOTTOM w0.254: v1(85.6,24.89) 86.36,24.89 86.84,25.37 v1(101.07,25.37)
DBG_LED_1: length 30.3
  TOP w0.254: D8.2 98.04,20.57 98.51,21.04 98.51,23.67 98.3,23.88 98.3,34.04 96.75,35.58 U4.38
DBG_LED_2: length 31.8
  TOP w0.254: U4.39 97.52,36.08 100.08,33.53 D9.2
ESP_CHPD: length 13.4
  TOP w0.254: U4.55 88.89,51.57 v1(88.14,52.32)
  BOTTOM w0.254: JR1.6 87.38,53.09 v1(88.14,52.32)
ESP_RST: length 14.1
  TOP w0.254: U4.50 91.39,52.86 91.57,53.04 v1(91.57,53.85)
  BOTTOM w0.254: v1(91.57,53.85) 90.68,53.85 89.92,54.61 JR1.7
ESP_RX: length 16
  TOP w0.254: JR1.1 91.36,56.82 91.36,54.79 90.89,54.31 U4.51
ESP_TX: length 16.9
  TOP w0.254: JR1.5 86.16,54.05 89.2,54.05 90.39,52.87 U4.52
GSM_RST: length 68.6
  TOP w0.254: v1(97.79,22.35) 97.49,22.66 97.49,34.09 96.49,35.08 U4.37 ; v1(76.33,21.46) 75.44,22.35 59.74,22.35 59.49,22.1 v1(58.93,22.1)
  BOTTOM w0.254: v1(76.33,21.46) 77.22,22.35 v1(97.79,22.35) ; J11.5 56.13,31.5 56.13,24.89 v1(58.93,22.1)
GSM_RX: length 39.8
  TOP w0.254: U4.16 81.48,33.08 74.61,26.21 74.54,26.21 74.49,26.16 58.93,26.16 58.8,26.03 v1(57.4,26.03)
  BOTTOM w0.254: v1(57.4,26.03) 57.01,26.43 57.01,34.69 55.88,35.81 J11.4
GSM_TX: length 42.7
  TOP w0.254: v1(60.39,25.51) 74.49,25.51 74.73,25.76 74.8,25.76 80.08,31.04 83.94,31.04 83.98,31.08 U4.17
  BOTTOM w0.254: v1(60.39,25.51) 60.39,26.07 57.66,28.8 57.66,36.83 56.13,38.35 J11.3
JTCK-SWCLK: length 32.5
  TOP w0.254: U4.49 91.89,43.43 91.9,43.44 91.9,52.53 95,55.63 95,65.02 100.33,70.36 J3.2
JTMS-SWDIO: length 40.6
  TOP w0.254: U4.46 95.76,39.58 96.39,40.22 96.39,65.4 99.82,68.83 104.39,68.83 105.41,69.85 J3.4
LED: length 3
  TOP w0.508: R30.1 64.77,58.93 65.05,58.64 U9.5
MCU_DM: length 42.6
  TOP w0.254: v1(107.44,67.56) 108.27,67.56 108.52,67.31 R15.1 ; v1(107.44,66.04) 99.82,66.04 98.45,64.67 98.45,40.32 96.71,38.58 U4.44
  BOTTOM w0.254: v1(107.44,66.04) v1(107.44,67.56)
MCU_DP: length 41.7
  TOP w0.254: U4.45 96.57,39.08 97.99,40.51 97.99,65.23 99.57,66.8 107.95,66.8 108.38,66.37 108.6,66.37 109.18,65.79 R14.1
MCU_SCL: length 24.4
  TOP w0.254: 87.62,17.54 U6.6 85.98,17.65 85.09,18.54 85.09,20.18 90.39,25.48 U4.29
  TOP w0.305: 91.95,21.34 91.95,20.46 89.14,17.65 88.14,17.65
  TOP w0.381: R18.2 91.95,21.34 ; 88.14,17.65 U6.6
MCU_SDA: length 20.6
  TOP w0.254: U4.30 90.89,25.33 85.85,20.3 85.85,19.17 86.1,18.92 87.62,18.92
  TOP w0.381: 87.62,18.92 89.21,18.92 90.42,20.14 R17.2
MOTOR1_A: length 10.7
  BOTTOM w0.762: J5.6 60.71,11.4 U7.11
MOTOR1_B: length 13.8
  BOTTOM w0.762: U7.14 64.77,9.65 62.45,9.65 J5.5
MOTOR1_ENC: length 67.7
  TOP w0.254: U4.34 95.2,33.58 96.01,32.77 96.01,3.67 94.93,2.59 94.55,2.59 63.87,2.59 J5.4
MOTOR1_SA: length 72.3
  TOP w0.254: J5.3 63.1,6.86 50.8,6.86 44.45,13.21 44.45,16.51 55.11,27.18 74.22,27.18 81.12,34.08 U4.14
MOTOR1_SB: length 76.8
  TOP w0.203: 45.72,17.07 45.72,13.46 51.56,7.62 52.32,7.62
  TOP w0.254: U4.15 81.33,33.58 74.42,26.67 55.32,26.67 45.72,17.07 ; 52.32,7.62 69.34,7.62 J5.1
MOTOR2_A: length 27.5
  BOTTOM w0.762: J6.6 76.48,13.94 73.41,17.02 64.52,17.02 U7.6
MOTOR2_B: length 25.7
  TOP w0.762: 79.73,5.33 J6.5
  BOTTOM w0.762: J6.5 79.98,15.78 77.47,18.29 69.34,18.29 68.33,19.3 U7.3
MOTOR2_ENC: length 43.7
  TOP w0.254: U4.33 94.94,33.08 95.5,32.51 95.5,3.81 94.74,3.05 85.51,3.05 J6.4
MOTOR2_SA: length 32.3
  TOP w0.254: U4.24 87.89,25.6 83.37,21.08 82.04,21.08 81.17,20.21 v1(81.17,18.8)
  BOTTOM w0.254: 86.73,4.97 86.77,4.93 ; 86.73,4.97 86.84,5.08 J6.3 ; 86.73,4.97 81.17,10.53 v1(81.17,18.8)
MOTOR2_SB: length 38.5
  TOP w0.254: U4.25 88.39,25.42 82.78,19.81 v1(82.04,19.81) ; J6.1 93.73,5.33
  BOTTOM w0.254: v1(82.04,19.81) 82.04,11.18 85.6,7.62 92.71,7.62 93.98,6.35 J6.1
MOTOR3_A: length 15.4
  BOTTOM w0.762: U8.3 21.08,11.77 19.42,10.11 14.71,10.11 J7.6
MOTOR3_B: length 19.8
  BOTTOM w0.762: 13.18,5.4 13.05,5.27 ; 13.18,5.4 J7.5 ; 13.18,5.4 15.91,8.13 25.06,8.13 28.7,11.77 U8.6
MOTOR3_ENC: length 117.8
  TOP w0.254: U4.36 96.23,34.58 97.03,33.78 97.03,2.79 95.76,1.52 18.54,1.52 16.68,3.39 J7.4
MOTOR3_SA: length 78
  TOP w0.254: J7.3 20.18,6.21 22.86,8.89 37.34,8.89 40.89,12.45 40.89,15.66 58.33,33.1 73.99,33.1 77.97,37.08 U4.8
MOTOR3_SB: length 70.2
  TOP w0.254: J7.1 28.19,6.1 28.19,6.16 30.16,8.13 37.23,8.13 41.66,12.55 41.66,15.77 58.39,32.51 74.1,32.51 75.27,33.69 76,34.42 76.25,34.66 78.16,36.58 U4.9
MOTOR4_A: length 30
  BOTTOM w0.762: J8.6 32.03,6.41 36.83,11.21 36.83,14.99 36.07,15.75 25.91,15.75 U8.14
MOTOR4_B: length 24.9
  BOTTOM w0.762: U8.11 28.7,19.05 29.46,18.29 36.07,18.29 38.85,15.51 38.85,8.4 J8.5
MOTOR4_ENC: length 92.9
  TOP w0.254: U4.35 95.77,34.08 96.52,33.33 96.52,3.3 95.35,2.13 95.1,2.13 94.99,2.02 41.01,2.02 39.03,4 J8.4
MOTOR4_SA: length 59.1
  TOP w0.254: U4.10 78.31,36.08 77.54,35.31 76.19,33.96 75.73,33.5 74.29,32.05 58.58,32.05 42.53,16 J8.3
MOTOR4_SB: length 61
  TOP w0.254: J8.1 49.53,5.59 49.27,5.84 49.02,5.84 43.18,11.68 43.18,16.01 58.77,31.6 74.48,31.6 76.38,33.5 78.46,35.58 U4.11
NRST: length 92.8
  TOP w0.203: U4.7 77.71,37.58 73.91,33.78 68.38,33.78 68.1,34.06 68.1,34.11 67.74,34.47 67.69,34.47 65.53,36.63 B1.1
  TOP w0.254: v1(97.28,64.52) 97.28,65.28 99.82,67.82 105.16,67.82 107.95,70.61 J3.5 ; v1(78.23,45.21) 80.26,45.21 v1(80.77,45.72) ; v1(95.76,64.52) 95.76,53.85 92.71,50.8 v1(92.71,46.23) ; 64.3,37.26 64.06,37.26 63.88,37.08 ; v1(74.93,45.21) 70.87,45.21 65.53,39.88 B1.1
  TOP w0.508: R19.2 64.12,37.08 64.3,37.26 B1.1
  TOP w0.762: R19.2 C32.1
  BOTTOM w0.254: v1(80.77,45.72) 92.2,45.72 v1(92.71,46.23) ; v1(74.93,45.21) v1(78.23,45.21) ; v1(97.28,64.52) v1(95.76,64.52)
PC14: length 10.8
  TOP w0.254: U4.3 81.32,39.58 77.72,43.18 Y1.1 76.05,43.18 75.79,43.43 C18.2
PC15: length 10.6
  TOP w0.254: U4.4 80.81,39.08 77.81,42.08 Y1.2 76.12,42.08 75.94,41.9 73.86,41.9 73.85,41.91 C19.2
PWM1_A: length 46
  TOP w0.254: U4.26 88.89,25.27 75.55,11.94 v1(73.15,11.94) ; U7.10 62.43,8.94 71.68,8.94 v1(73.15,10.41)
  BOTTOM w0.254: v1(73.15,11.94) v1(73.15,10.41)
PWM1_B: length 31.8
  TOP w0.254: U4.27 89.39,25.13 75.44,11.18 71.63,11.18 70.87,11.94 U7.15
PWM2_A: length 33
  TOP w0.254: v1(80.77,25.15) 78.99,25.15 v1(76.31,22.46) ; U4.56 88.39,34.54 88.26,34.42 v1(88.26,33.35)
  BOTTOM w0.254: v1(88.26,33.35) 88.26,32.38 87.63,31.75 87.12,31.75 82.93,27.56 82.93,26.54 81.53,25.15 v1(80.77,25.15) ; v1(76.31,22.46) 72.5,22.46 U7.2
PWM2_B: length 46.5
  TOP w0.254: U4.57 87.89,34.8 87.38,34.29 v1(87.38,32.77) ; U7.7 58.03,20.83 57.45,21.41 57.45,22.4 57.91,22.86 75.44,22.86 78.74,26.16 v1(81.28,26.16)
  BOTTOM w0.254: v1(81.28,26.16) 82.37,27.25 82.37,27.76 v1(87.38,32.77)
PWM3_A: length 85.5
  TOP w0.254: v1(54.36,22.86) 55.63,22.86 56.15,23.38 75.2,23.38 78.81,26.99 v1(80.59,26.99) ; v1(86.74,33.4) 86.74,34.42 87.39,35.06 U4.58 ; U8.15 22.61,24.64 46.02,24.64 46.86,23.8 v1(46.86,22.86)
  BOTTOM w0.254: v1(54.36,22.86) v1(46.86,22.86) ; v1(80.59,26.99) 81.23,26.99 81.92,27.68 81.92,28.02 86.74,32.84 v1(86.74,33.4)
PWM3_B: length 72.2
  TOP w0.254: v1(81.28,27.94) 79.11,27.94 75.05,23.88 56,23.88 55.74,23.62 v1(55.12,23.62) ; v1(46.12,22.35) 46.12,23.28 45.77,23.62 34.29,23.62 U8.10 ; v1(85.6,32.77) 85.99,33.16 85.99,34.69 86.89,35.58 U4.59
  BOTTOM w0.254: v1(55.12,23.62) 46.37,23.62 46.12,23.37 v1(46.12,22.35) ; v1(81.28,27.94) 81.41,28.07 81.41,28.46 85.47,32.52 85.47,32.64 v1(85.6,32.77)
PWM4_A: length 86.9
  TOP w0.254: U8.2 21.59,16 31.5,16 38.1,22.61 44.7,22.61 v1(45.47,21.84) ; v1(84.84,33.27) 84.84,34.29 85.89,35.34 U4.61 ; v1(54.61,24.51) 56.12,24.51 56.21,24.42 74.94,24.42 78.92,28.4 78.94,28.4 79.5,28.96 v1(80.52,28.96)
  BOTTOM w0.254: v1(54.61,24.51) 45.85,24.51 45.47,24.13 v1(45.47,21.84) ; v1(84.84,33.27) 84.84,32.63 81.16,28.96 v1(80.52,28.96)
PWM4_B: length 74.7
  TOP w0.254: v1(81.28,29.97) 79.76,29.97 74.66,24.88 56.4,24.88 56,25.28 v1(55.12,25.28) ; U8.7 31.24,14.73 38.24,21.73 44.05,21.73 v1(44.45,21.34) ; v1(83.95,32.64) 83.95,34.16 85.39,35.6 U4.62
  BOTTOM w0.254: v1(81.28,29.97) v1(83.95,32.64) ; v1(44.45,21.34) 44.45,24.13 45.6,25.28 v1(55.12,25.28)
RF: length 6.1
  TOP w0.762: 71.48,71.88 71.41,71.82
  TOP w0.889: 71.48,71.88 C40.1 L3.1 ; U9.18 70.85,71.26 71.41,71.82
RS485_A: length 20.1
  TOP w0.254: U11.6 108.46,61.09 108.71,60.83 108.71,47.05 106.74,45.08 J10.1
RS485_B: length 16.8
  TOP w0.254: U11.7 104.66,62.36 104.14,61.84 104.14,57.4 101.85,55.12 101.85,50.36 J10.4
RS485_DE: length 31.6
  TOP w0.254: U11.3 102.61,61.09 102.87,60.82 102.87,58.67 99.82,55.63 99.82,39.12 97.79,37.08 U4.41
RS485_DI: length 28.2
  TOP w0.254: U4.42 97.52,37.58 99.36,39.42 99.36,59.62 99.56,59.82 U11.4
RS485_RE: length 34
  TOP w0.254: U4.40 98.05,36.58 100.28,38.81 100.28,55.07 103.38,58.17 103.38,61.58 102.61,62.36 U11.2
RS485_RO: length 32.3
  TOP w0.254: U4.43 97.01,38.08 98.91,39.98 98.91,63.86 99.37,64.31 99.63,64.31 100.32,63.63 101.08,63.63
USB_DM: length 5.1
  TOP w0.254: R14.2 112.01,65.79 113.68,64.12 J4.2
USB_DP: length 5.4
  TOP w0.254: R15.2 111.51,67.31 114.05,64.77 J4.3
VS_L298A: length 10.2
  TOP w1.27: R25.1 52.83,17.4 C33.1 C34.2
  TOP w1.524: U7.8 54.23,20.83 R25.1 R26.2
VS_L298B: length 12.9
  TOP w1.143: C35.2 C36.1 36.96,17.78 R28.2 R27.1
  TOP w1.27: C35.2 U8.8
ZM_INT0: length 58.1
  TOP w0.254: v1(87.12,43.94) 87.52,44.34 87.52,50.67 87.26,50.93 73.79,50.93 v1(73.15,51.56) ; v1(61.98,60.2) 63.42,61.64 U9.3 ; U4.23 87.39,31.75 87.41,31.77 87.41,31.9 87.77,32.26 88.39,32.26 89.15,33.02 v1(89.15,40.64)
  BOTTOM w0.203: v1(87.12,43.94) 89.15,41.91 v1(89.15,40.64)
  BOTTOM w0.254: v1(61.98,60.2) 61.98,56.64 67.06,51.56 v1(73.15,51.56)
ZM_INT1: length 54.2
  TOP w0.254: v1(88.14,43.94) 88.14,51.31 87.88,51.56 v1(74.68,51.56) ; U4.28 v1(89.89,41.15) ; U9.4 v1(63.25,60.14)
  BOTTOM w0.203: v1(89.89,41.15) 89.89,42.19 v1(88.14,43.94)
  BOTTOM w0.254: v1(74.68,51.56) 73.77,52.47 67.93,52.47 63.25,57.15 v1(63.25,60.14)
ZM_RESET: length 40.2
  TOP w0.254: U4.2 83.36,40.08 83.57,40.28 83.57,41.4 82.55,42.42 80.01,42.42 74.93,47.5 J9.3 ; R29.1 61.98,61.98 v1(60.96,60.96)
  BOTTOM w0.254: J9.3 74.93,50.04 74.42,50.55 66.04,50.55 60.96,55.63 v1(60.96,60.96)
ZM_RX: length 30.7
  TOP w0.254: v1(85.09,52.32) 84.53,52.32 84.28,52.07 75.12,52.07 73.85,53.34 U9.10 ; v1(84.58,53.85) 84.98,53.45 89.04,53.45 89.89,52.61 U4.53
  BOTTOM w0.254: v1(84.58,53.85) 85.09,53.34 v1(85.09,52.32)
ZM_TX: length 26.8
  TOP w0.254: U9.15 79.76,61.64 83.74,57.66 83.74,53.53 84.32,52.96 88.66,52.96 89.39,52.23 U4.54
ZWAVE_SPI_CS: length 20
  TOP w0.254: U10.1 63.61,50.52 64.52,51.42 R31.2 64.55,52.58 68.11,56.13 73.29,56.13 77.3,60.14 U9.14
ZWAVE_SPI_MISO: length 12.8
  TOP w0.254: U9.7 69.35,52.33 67.31,50.29 J9.6 63.22,48.77 62.56,49.44 U10.2
ZWAVE_SPI_MOSI: length 21.2
  TOP w0.254: U10.5 61.25,43.14 61.93,42.47 66.09,42.47 J9.4 72.39,50.04 72.35,50.08 U9.9
ZWAVE_SPI_SCLK: length 18.8
  TOP w0.254: U10.6 61.9,43.25 62.23,42.93 65.39,42.93 69.85,47.38 J9.5 69.85,50.29 70.85,51.29 U9.8
N7856489: length 2.4
  TOP w0.203: R12.2 86.36,44.28 86.39,44.26 U4.60
N7856549: length 11.4
  TOP w0.203: Y2.3 73.44,35.09 C21.1
  TOP w0.254: Y2.3 75.1,36.49 76.69,38.08 U4.6
N7856557: length 13.3
  TOP w0.254: C20.1 71.63,39.98 71.84,39.76 Y2.1 71.84,38.62 72.71,37.76 75.23,37.76 76.05,38.58 U4.5
N7858677: length 2.2
  TOP w0.254: R8.1 D4.1
N7861566: length 4
  TOP w0.254: C39.1 R29.2 64.2,62.99 64.35,63.14 U9.2
N7870414: length 4.7
  TOP w0.254: R13.2 112.78,64.26 113.57,63.47 J4.1
N7870518: length 6.5
  TOP w0.254: J4.4 114.16,65.42 112.52,67.06 112.52,68.26 111.95,68.83 R16.2
N7874965: length 72.9
  TOP w0.203: 28.45,36.83 28.45,36.6 27.34,35.5
  TOP w0.254: U4.1 81.09,40.58 75.82,45.85 70.49,45.85 64.77,40.13 v1(56.64,40.13)
  TOP w0.381: C22.1 v1(29.46,38.61)
  TOP w0.762: U5.1 27.34,35.73 28.45,36.83 C22.1
  BOTTOM w0.381: v1(29.46,38.61) 44.7,38.61 51.56,45.47 55.07,45.47 56.64,43.89 v1(56.64,40.13)
N7889145: length 6
  TOP w0.254: D8.1 98.04,6.41 97.54,5.91 97.54,2.79 97.79,2.54 R23.1
N7950983: length 2.9
  TOP w0.254: 33.15,70.99 33.45,70.69 33.45,70.44
  TOP w0.508: U1.4 33.45,70.44 33.15,70.75 R1.1
N7951075: length 1.2
  TOP w0.254: 33.53,67.06 33.45,67.14
  TOP w0.381: 36.36,62.74 L1.1
  TOP w0.762: 33.45,67.14 U1.6
N7951087: length 6.6
  TOP w0.254: R4.2 39.24,71.54 37.49,69.78 U1.3
  TOP w0.381: R4.2 40.39,71.88 40.51,71.75 R2.2
N7953648: length 3.9
  TOP w0.305: C1.1 38.46,69.47 36.87,67.88 U1.1
N7971855: length 2
  TOP w0.381: U2.4 49.08,53.15 49.7,52.52 50.49,52.52 R5.2
N7971871: length 1.5
  TOP w0.381: U2.1 46.08,55.12 C6.1
N7971887: length 5
  TOP w0.381: U2.3 46.15,52.46 46.23,52.38 R7.1 46.23,49.66 45.85,49.28 R6.1
N7975298: length 3.2
  TOP w0.254: D9.1 100.08,6.35 98.81,5.08 R24.1
N7976019: length 1.8
  TOP w0.254: R9.1 22.61,61.21 22.73,61.34 D5.1
N7976225: length 3.7
  TOP w0.254: 58.17,48.83 57.59,48.26
  TOP w0.508: D6.1 58.17,48.7 57.72,48.26 R10.1
N7976823: length 2.3
  TOP w0.203: R11.1 D7.1
N79509350: length 2
  TOP w0.381: R3.2 41.66,68.2 R2.1
N79587921: length 1.8
  TOP w0.508: D10.2 61.72,57.28 R30.2

## Copper pours and planes (outline as drawn; the poured copper is in the pictures)
13.8V on TOP: 40.39,59.44 39.62,60.2 39.62,66.04 40.13,66.55 41.66,66.55 42.67,67.56 42.67,72.64 43.94,73.91 46.74,73.91 47.24,73.41 47.24,64.01 46.74,63.5 45.21,63.5 44.2,62.48 44.2,60.96 42.67,59.44
16V on TOP (solid shape): 25.97,73.22 26.4,73.22 26.4,73.91 26.94,73.91 26.94,73.22 27.37,73.22 27.37,73.91 30.73,73.91 31.75,72.9 31.75,70.87 32.26,70.36 32.26,69.6 32.77,69.09 34.04,69.09 34.04,68.58 24.89,68.58 20.07,63.75 16,63.75 15.24,64.52 15.24,67.31 17.27,69.34 19.81,69.34 20.57,70.1 20.57,70.53 27.37,70.53 27.37,70.99 31.03,70.99 31.03,71.5 30.54,71.5 30.54,70.99 27.37,70.99 27.37,71.39 26.94,71.39 26.94,70.53 26.4,70.53 26.4,71.39 25.97,71.39 25.97,70.53 20.57,70.53 20.57,72.14 20.7,72.26 31.03,72.26 31.03,72.77 30.54,72.77 30.54,72.26 20.7,72.26 22.35,73.91 25.97,73.91
GND on TOP (solid shape): 50.29,70.61 50.29,56.39 50.04,56.13 49.02,56.13 48.77,56.39 48.77,57.15 48.01,57.91 33.27,57.91 31.24,59.94 24.13,59.94 23.88,60.2 23.88,66.55 25.4,68.07 32.26,68.07 32.51,67.82 32.51,62.74 34.29,60.96 34.29,59.69 35.05,58.93 42.67,58.93 44.7,60.96 44.7,61.98 45.72,62.99 46.74,62.99 47.75,64.01 47.75,70.87 50.04,70.87
GND on TOP (solid shape): outline of 315 points within 0.25,25.65 23.37,77.22
GND on TOP: 75.87,57.86 81.99,57.86 82.5,57.35 82.5,54.56 82.35,54.41 77.17,54.41 75.64,55.93 75.64,57.63
GND on TOP: 107.7,3.05 107.7,44.2 109.98,46.48 109.98,60.2 110.49,60.71 111,60.71 111.25,60.96 111.25,61.47 111.51,61.72 111.76,61.72 112.78,62.74 112.78,64.26 114.55,66.04 116.33,66.04 116.59,66.29 116.59,69.34 116.33,69.6 113.92,69.6 113.54,69.98 110.36,69.98 109.73,69.34 109.73,68.33 108.71,68.33 108.71,69.98 109.73,70.99 109.73,72.26 109.09,72.9 96.65,72.9 96.08,72.33 96.08,71.44 92.96,68.33 92.96,63.75 91.44,62.23 91.44,59.69 91.19,59.44 86.61,59.44 85.34,58.17 84.33,58.17 79.5,62.99 77.22,62.99 76.45,62.23 76.45,60.2 72.9,56.64 68.07,56.64 65.79,54.36 61.47,54.36 60.71,53.59 60.71,53.34 60.2,52.83 60.2,51.82 59.69,51.31 56.9,51.31 56.13,52.07 56.13,73.66 56.39,73.91 76.2,73.91 76.45,73.66 76.45,72.9 76.2,72.64 71.12,72.64 70.1,71.63 70.1,67.06 70.36,66.8 71.12,66.8 71.88,67.56 71.88,70.87 76.45,70.87 76.71,70.61 76.71,69.34 78.74,67.31 87.12,67.31 97.03,77.22 123.7,77.22 124.71,76.2 124.71,1.52 123.7,0.51 110.24,0.51 ; 1 cut-out
GND on TOP: 30.99,48.01 27.18,51.82 27.18,53.85 27.43,54.1 31.5,54.1 33.02,52.58 35.05,52.58 37.08,50.55 39.37,50.55 41.66,48.26 45.97,48.26 46.99,49.28 46.99,53.67 46.79,53.85 45.72,53.85 45.72,54.36 47.24,54.36 48.26,53.34 48.26,48.77 44.96,45.47 38.35,45.47 35.81,48.01
GND on TOP: 72.39,43.69 72.14,43.94 70.1,43.94 67.06,40.89 67.06,35.56 68.33,34.29 72.14,34.29 72.39,34.54
GND on TOP: 36.32,68.58 35.31,68.58 34.54,69.34 34.54,73.15 35.31,73.91 37.85,73.91 38.1,73.66 38.1,71.37 37.08,70.36 36.07,70.36 35.56,69.85 35.56,69.09 36.32,69.09
GND on TOP: 72.64,41.15 72.64,38.35 72.9,38.1 74.68,38.1 75.44,38.86 78.49,38.86 78.74,39.12 78.74,39.88 77.47,41.15
GND on BOTTOM: outline of 95 points within 0.25,0.25 124.71,77.22
GND on BOTTOM: 107.7,43.18 104.14,43.18 97.28,50.04 93.98,50.04 93.98,44.45 100.08,38.35 100.08,36.58 101.85,38.35 107.7,38.35
GND on BOTTOM: 75.69,69.09 76.96,69.09 78.74,67.31 82.3,67.31 86.87,62.74 86.87,59.69 84.33,59.69 83.57,58.93 75.69,66.8
VCC3.3V on TOP: 74.8,53.96 75.87,55.14 77.22,53.85 83.06,53.85 83.31,53.59 83.31,52.83 83.06,52.58 75.69,52.58 74.8,53.47 ; 1 cut-out
VCC3.3V on TOP: 15.75,63.25 15.75,59.69 17.02,58.42 17.02,49.28 19.3,46.99 21.84,46.99 24.38,44.45 24.38,43.43 27.94,39.88 31.5,39.88 32,40.39 32,41.91 22.1,51.82 19.3,51.82 18.8,52.32 18.8,58.42 19.81,59.44 19.81,63.25
VCC3.3V on BOTTOM: 58.17,42.93 55.12,45.97 49.28,45.97 43.18,39.88 27.94,39.88 25.4,42.42 25.4,44.2 28.7,47.5 56.64,47.5 60.96,43.18 64.77,43.18 65.28,42.67 65.28,34.29 69.09,30.48 74.42,30.48 80.52,24.38 86.87,24.38 87.38,24.89 102.11,24.89 103.63,26.42 104.65,26.42 104.65,25.4 102.36,23.11 64.77,23.11 58.17,29.72
VCC_5V on TOP: 34.54,26.67 33.02,28.19 33.02,41.4 22.1,52.32 20.07,52.32 19.56,52.83 19.56,58.17 20.83,59.44 31.24,59.44 33.02,57.66 39.88,57.66 40.39,57.15 40.39,52.07 39.37,51.05 37.34,51.05 35.56,52.83 33.53,52.83 32,54.36 26.67,54.36 26.16,53.85 26.16,51.82 30.48,47.5 35.56,47.5 39.62,43.43 39.62,27.69 38.61,26.67
VCC_5V on BOTTOM: 33.02,29.72 33.02,20.32 33.27,20.07 34.8,20.07 39.62,24.89 43.94,24.89 44.96,25.91 49.78,25.91 51.56,27.69 51.56,29.46 51.05,29.97 49.78,29.97 48.01,28.19 39.62,28.19 39.62,30.23 33.53,30.23
VIN on TOP (solid shape): outline of 84 points within 40.39,28.7 55.88,73.91
N7951075 on TOP (solid shape): 34.04,67.56 34.8,66.8 36.58,66.8 38.1,68.33 40.13,68.33 40.39,68.07 40.39,67.31 39.12,66.04 39.12,60.2 38.35,59.44 35.31,59.44 35.11,59.63 37.06,59.63 37.06,61.03 36.48,61.03 36.48,59.63 35.52,59.63 35.52,61.03 34.95,61.03 34.95,59.79 34.54,60.2 34.54,61.21 32.77,62.99 32.77,64.45 37.06,64.45 37.06,65.84 36.48,65.84 36.48,64.45 35.52,64.45 35.52,65.84 34.95,65.84 34.95,64.45 32.77,64.45 32.77,68.33 34.04,68.33
N7971879 on TOP: 49.53,55.12 49.53,55.63 49.28,55.88 48.26,55.88 47.75,56.39 47.75,57.4 47.5,57.66 42.16,57.66 41.66,57.15 41.66,51.05 41.91,50.8 43.43,50.8 43.69,51.05 43.69,55.63 44.2,56.13 45.21,56.13 45.47,55.88 46.74,55.88 47.75,54.86 49.28,54.86

## Text on the board
Ref Des/Silkscreen Bottom: SB | V+ | V- | M1+ | M1- | ENC | SA | COM | M2+ | M2- | M3+ | M3- | M4+ | M4-
Ref Des/Assembly Top: U*
Ref Des/Silkscreen Top: MH4 | 5V | GND | TX | RX | RS | SO | CK | SI | V- | V+ | 3V3 | IO | MH2 | MH3
